# EAGLE board ai_breakout_apa102_panel (EAGLE 6.5.0), part 1 of 2
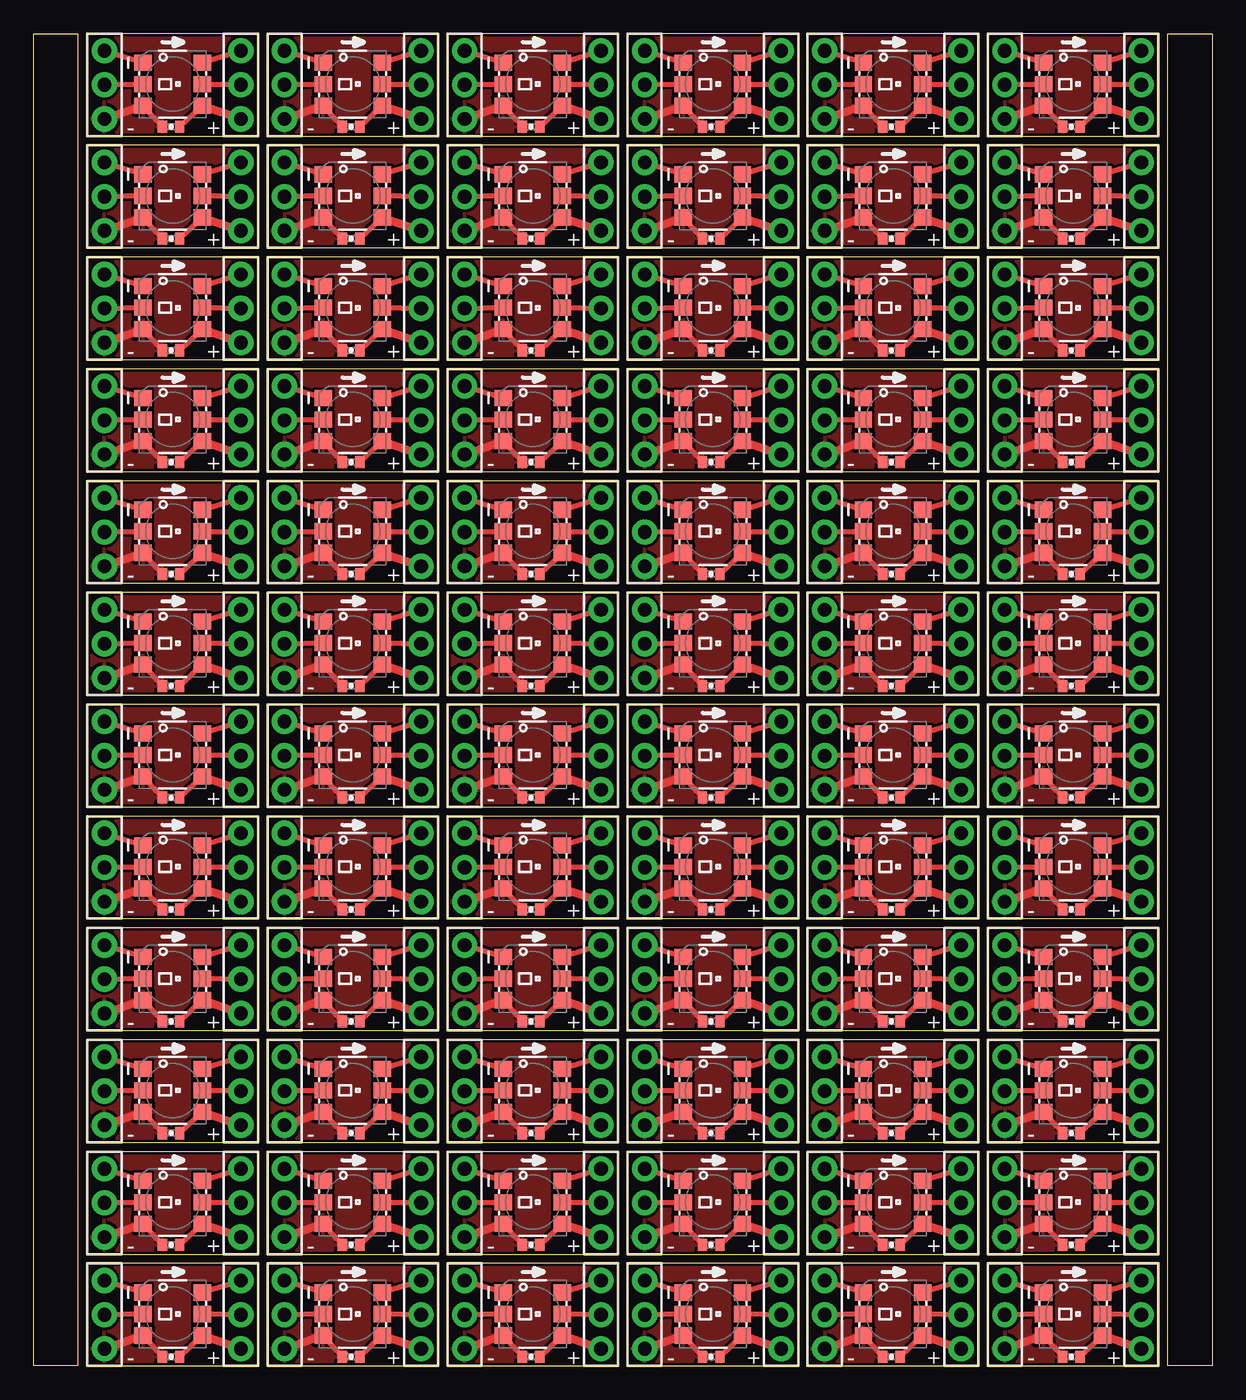
[diagram p0: board, top side]
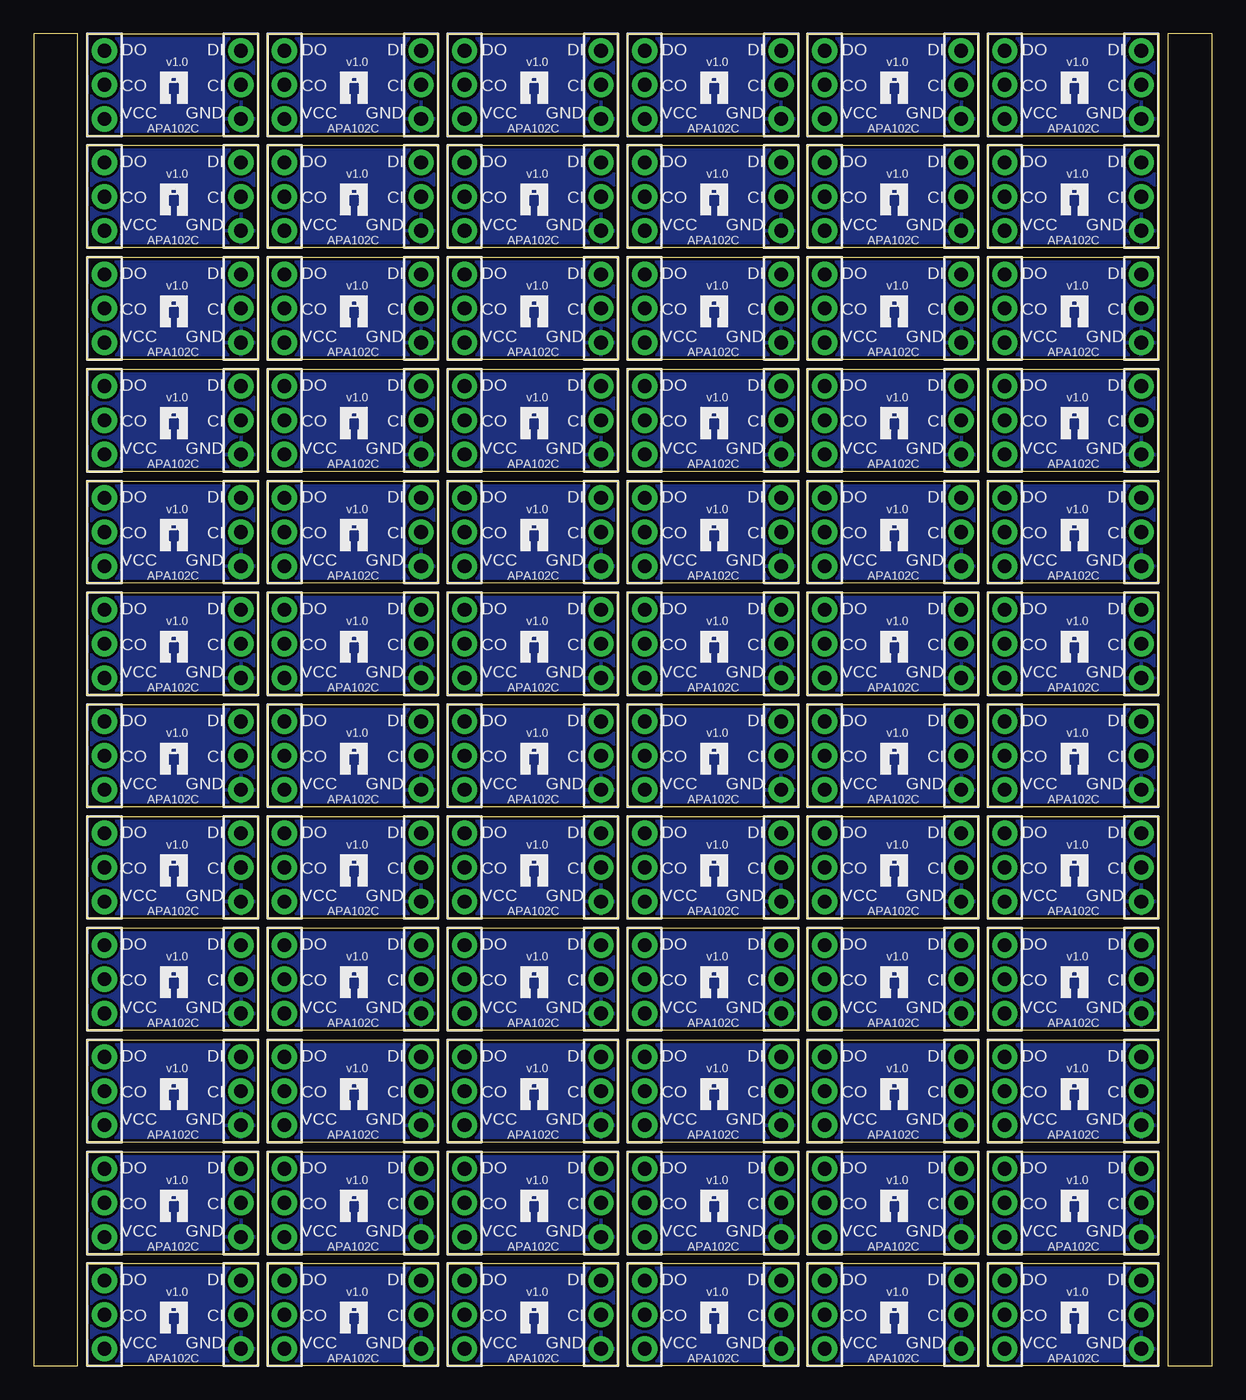
[diagram p1: board, bottom side, seen from below]

Size 87.7 x 99.14 mm. Coordinates in mm from the lower left corner, seen from the top.
Outline: 4,0 16.7,0 16.7,7.62 4,7.62 4,0
Outline: 0,0 0,99.14 3.3,99.14 3.3,0 0,0
Outline: 4,8.32 16.7,8.32 16.7,15.94 4,15.94 4,8.32
Outline: 4,16.64 16.7,16.64 16.7,24.26 4,24.26 4,16.64
Outline: 4,24.96 16.7,24.96 16.7,32.58 4,32.58 4,24.96
Outline: 4,33.28 16.7,33.28 16.7,40.9 4,40.9 4,33.28
Outline: 4,41.6 16.7,41.6 16.7,49.22 4,49.22 4,41.6
Outline: 4,49.92 16.7,49.92 16.7,57.54 4,57.54 4,49.92
Outline: 4,58.24 16.7,58.24 16.7,65.86 4,65.86 4,58.24
Outline: 4,66.56 16.7,66.56 16.7,74.18 4,74.18 4,66.56
Outline: 4,74.88 16.7,74.88 16.7,82.5 4,82.5 4,74.88
Outline: 4,83.2 16.7,83.2 16.7,90.82 4,90.82 4,83.2
Outline: 4,91.52 16.7,91.52 16.7,99.14 4,99.14 4,91.52
Outline: 17.4,0 30.1,0 30.1,7.62 17.4,7.62 17.4,0
Outline: 17.4,8.32 30.1,8.32 30.1,15.94 17.4,15.94 17.4,8.32
Outline: 17.4,16.64 30.1,16.64 30.1,24.26 17.4,24.26 17.4,16.64
Outline: 17.4,24.96 30.1,24.96 30.1,32.58 17.4,32.58 17.4,24.96
Outline: 17.4,33.28 30.1,33.28 30.1,40.9 17.4,40.9 17.4,33.28
Outline: 17.4,41.6 30.1,41.6 30.1,49.22 17.4,49.22 17.4,41.6
Outline: 17.4,49.92 30.1,49.92 30.1,57.54 17.4,57.54 17.4,49.92
Outline: 17.4,58.24 30.1,58.24 30.1,65.86 17.4,65.86 17.4,58.24
Outline: 17.4,66.56 30.1,66.56 30.1,74.18 17.4,74.18 17.4,66.56
Outline: 17.4,74.88 30.1,74.88 30.1,82.5 17.4,82.5 17.4,74.88
Outline: 17.4,83.2 30.1,83.2 30.1,90.82 17.4,90.82 17.4,83.2
Outline: 17.4,91.52 30.1,91.52 30.1,99.14 17.4,99.14 17.4,91.52
Outline: 30.8,0 43.5,0 43.5,7.62 30.8,7.62 30.8,0
Outline: 30.8,8.32 43.5,8.32 43.5,15.94 30.8,15.94 30.8,8.32
Outline: 30.8,16.64 43.5,16.64 43.5,24.26 30.8,24.26 30.8,16.64
Outline: 30.8,24.96 43.5,24.96 43.5,32.58 30.8,32.58 30.8,24.96
Outline: 30.8,33.28 43.5,33.28 43.5,40.9 30.8,40.9 30.8,33.28
Outline: 30.8,41.6 43.5,41.6 43.5,49.22 30.8,49.22 30.8,41.6
Outline: 30.8,49.92 43.5,49.92 43.5,57.54 30.8,57.54 30.8,49.92
Outline: 30.8,58.24 43.5,58.24 43.5,65.86 30.8,65.86 30.8,58.24
Outline: 30.8,66.56 43.5,66.56 43.5,74.18 30.8,74.18 30.8,66.56
Outline: 30.8,74.88 43.5,74.88 43.5,82.5 30.8,82.5 30.8,74.88
Outline: 30.8,83.2 43.5,83.2 43.5,90.82 30.8,90.82 30.8,83.2
Outline: 30.8,91.52 43.5,91.52 43.5,99.14 30.8,99.14 30.8,91.52
Outline: 44.2,0 56.9,0 56.9,7.62 44.2,7.62 44.2,0
Outline: 44.2,8.32 56.9,8.32 56.9,15.94 44.2,15.94 44.2,8.32
Outline: 44.2,16.64 56.9,16.64 56.9,24.26 44.2,24.26 44.2,16.64
Outline: 44.2,24.96 56.9,24.96 56.9,32.58 44.2,32.58 44.2,24.96
Outline: 44.2,33.28 56.9,33.28 56.9,40.9 44.2,40.9 44.2,33.28
Outline: 44.2,41.6 56.9,41.6 56.9,49.22 44.2,49.22 44.2,41.6
Outline: 44.2,49.92 56.9,49.92 56.9,57.54 44.2,57.54 44.2,49.92
Outline: 44.2,58.24 56.9,58.24 56.9,65.86 44.2,65.86 44.2,58.24
Outline: 44.2,66.56 56.9,66.56 56.9,74.18 44.2,74.18 44.2,66.56
Outline: 44.2,74.88 56.9,74.88 56.9,82.5 44.2,82.5 44.2,74.88
Outline: 44.2,83.2 56.9,83.2 56.9,90.82 44.2,90.82 44.2,83.2
Outline: 44.2,91.52 56.9,91.52 56.9,99.14 44.2,99.14 44.2,91.52
Outline: 57.6,0 70.3,0 70.3,7.62 57.6,7.62 57.6,0
Outline: 57.6,8.32 70.3,8.32 70.3,15.94 57.6,15.94 57.6,8.32
Outline: 57.6,16.64 70.3,16.64 70.3,24.26 57.6,24.26 57.6,16.64
Outline: 57.6,24.96 70.3,24.96 70.3,32.58 57.6,32.58 57.6,24.96
Outline: 57.6,33.28 70.3,33.28 70.3,40.9 57.6,40.9 57.6,33.28
Outline: 57.6,41.6 70.3,41.6 70.3,49.22 57.6,49.22 57.6,41.6
Outline: 57.6,49.92 70.3,49.92 70.3,57.54 57.6,57.54 57.6,49.92
Outline: 57.6,58.24 70.3,58.24 70.3,65.86 57.6,65.86 57.6,58.24
Outline: 57.6,66.56 70.3,66.56 70.3,74.18 57.6,74.18 57.6,66.56
Outline: 57.6,74.88 70.3,74.88 70.3,82.5 57.6,82.5 57.6,74.88
Outline: 57.6,83.2 70.3,83.2 70.3,90.82 57.6,90.82 57.6,83.2
Outline: 57.6,91.52 70.3,91.52 70.3,99.14 57.6,99.14 57.6,91.52
Outline: 71,0 83.7,0 83.7,7.62 71,7.62 71,0
Outline: 71,8.32 83.7,8.32 83.7,15.94 71,15.94 71,8.32
Outline: 71,16.64 83.7,16.64 83.7,24.26 71,24.26 71,16.64
Outline: 71,24.96 83.7,24.96 83.7,32.58 71,32.58 71,24.96
Outline: 71,33.28 83.7,33.28 83.7,40.9 71,40.9 71,33.28
Outline: 71,41.6 83.7,41.6 83.7,49.22 71,49.22 71,41.6
Outline: 71,49.92 83.7,49.92 83.7,57.54 71,57.54 71,49.92
Outline: 71,58.24 83.7,58.24 83.7,65.86 71,65.86 71,58.24
Outline: 71,66.56 83.7,66.56 83.7,74.18 71,74.18 71,66.56
Outline: 71,74.88 83.7,74.88 83.7,82.5 71,82.5 71,74.88
Outline: 71,83.2 83.7,83.2 83.7,90.82 71,90.82 71,83.2
Outline: 71,91.52 83.7,91.52 83.7,99.14 71,99.14 71,91.52
Outline: 84.4,0 84.4,99.14 87.7,99.14 87.7,0 84.4,0
Copper layers (1*16): Top 0.035mm / dielectric 1.5mm / Bottom 0.035mm
Design rules "ai_2layer": minimum track width 7mil, minimum drill 15mil, track to track 8mil, track to pad 8mil, pad to pad 8mil, via to via 8mil, smd to smd 8mil, copper to edge 8mil, drill to drill 8mil, minimum pad ring 12mil, minimum via ring 10mil, stop-mask expansion 4mil, vias tented up to drill 20mil, thermal gap 10mil

## Footprints (pad centres in the part's own frame; a part is rotated, then mirrored left to right if it is on the bottom)
CAP-0402 = smd 0.7 x 0.9: 1 -0.65,0; 2 0.65,0
1X03 = drill 1.016 pad 1.88: 1 -2.54,0; 2 0,0; 3 2.54,0
LED-APA102 = smd 1.3 x 1.2: 1 -2.2,1.6; 2 -2.2,0; 3 -2.2,-1.6; 4 2.2,-1.6; 5 2.2,0; 6 2.2,1.6
1X03-NOFIRST = drill 1.016 pad 1.88: 1 -2.54,0; 2 0,0; 3 2.54,0

## Placement (x,y rotation side)
C1  0.1uF  [CAP-0402]  10.22,0.69 180 top
C2  0.1uF  [CAP-0402]  10.22,9.01 180 top
C3  0.1uF  [CAP-0402]  10.22,17.33 180 top
C4  0.1uF  [CAP-0402]  10.22,25.65 180 top
C5  0.1uF  [CAP-0402]  10.22,33.97 180 top
C6  0.1uF  [CAP-0402]  10.22,42.29 180 top
C7  0.1uF  [CAP-0402]  10.22,50.61 180 top
C8  0.1uF  [CAP-0402]  10.22,58.93 180 top
C9  0.1uF  [CAP-0402]  10.22,67.25 180 top
C10  0.1uF  [CAP-0402]  10.22,75.57 180 top
C11  0.1uF  [CAP-0402]  10.22,83.89 180 top
C12  0.1uF  [CAP-0402]  10.22,92.21 180 top
C13  0.1uF  [CAP-0402]  23.62,0.69 180 top
C14  0.1uF  [CAP-0402]  23.62,9.01 180 top
C15  0.1uF  [CAP-0402]  23.62,17.33 180 top
C16  0.1uF  [CAP-0402]  23.62,25.65 180 top
C17  0.1uF  [CAP-0402]  23.62,33.97 180 top
C18  0.1uF  [CAP-0402]  23.62,42.29 180 top
C19  0.1uF  [CAP-0402]  23.62,50.61 180 top
C20  0.1uF  [CAP-0402]  23.62,58.93 180 top
C21  0.1uF  [CAP-0402]  23.62,67.25 180 top
C22  0.1uF  [CAP-0402]  23.62,75.57 180 top
C23  0.1uF  [CAP-0402]  23.62,83.89 180 top
C24  0.1uF  [CAP-0402]  23.62,92.21 180 top
C25  0.1uF  [CAP-0402]  37.02,0.69 180 top
C26  0.1uF  [CAP-0402]  37.02,9.01 180 top
C27  0.1uF  [CAP-0402]  37.02,17.33 180 top
C28  0.1uF  [CAP-0402]  37.02,25.65 180 top
C29  0.1uF  [CAP-0402]  37.02,33.97 180 top
C30  0.1uF  [CAP-0402]  37.02,42.29 180 top
C31  0.1uF  [CAP-0402]  37.02,50.61 180 top
C32  0.1uF  [CAP-0402]  37.02,58.93 180 top
C33  0.1uF  [CAP-0402]  37.02,67.25 180 top
C34  0.1uF  [CAP-0402]  37.02,75.57 180 top
C35  0.1uF  [CAP-0402]  37.02,83.89 180 top
C36  0.1uF  [CAP-0402]  37.02,92.21 180 top
C37  0.1uF  [CAP-0402]  50.42,0.69 180 top
C38  0.1uF  [CAP-0402]  50.42,9.01 180 top
C39  0.1uF  [CAP-0402]  50.42,17.33 180 top
C40  0.1uF  [CAP-0402]  50.42,25.65 180 top
C41  0.1uF  [CAP-0402]  50.42,33.97 180 top
C42  0.1uF  [CAP-0402]  50.42,42.29 180 top
C43  0.1uF  [CAP-0402]  50.42,50.61 180 top
C44  0.1uF  [CAP-0402]  50.42,58.93 180 top
C45  0.1uF  [CAP-0402]  50.42,67.25 180 top
C46  0.1uF  [CAP-0402]  50.42,75.57 180 top
C47  0.1uF  [CAP-0402]  50.42,83.89 180 top
C48  0.1uF  [CAP-0402]  50.42,92.21 180 top
C49  0.1uF  [CAP-0402]  63.82,0.69 180 top
C50  0.1uF  [CAP-0402]  63.82,9.01 180 top
C51  0.1uF  [CAP-0402]  63.82,17.33 180 top
C52  0.1uF  [CAP-0402]  63.82,25.65 180 top
C53  0.1uF  [CAP-0402]  63.82,33.97 180 top
C54  0.1uF  [CAP-0402]  63.82,42.29 180 top
C55  0.1uF  [CAP-0402]  63.82,50.61 180 top
C56  0.1uF  [CAP-0402]  63.82,58.93 180 top
C57  0.1uF  [CAP-0402]  63.82,67.25 180 top
C58  0.1uF  [CAP-0402]  63.82,75.57 180 top
C59  0.1uF  [CAP-0402]  63.82,83.89 180 top
C60  0.1uF  [CAP-0402]  63.82,92.21 180 top
C61  0.1uF  [CAP-0402]  77.22,0.69 180 top
C62  0.1uF  [CAP-0402]  77.22,9.01 180 top
C63  0.1uF  [CAP-0402]  77.22,17.33 180 top
C64  0.1uF  [CAP-0402]  77.22,25.65 180 top
C65  0.1uF  [CAP-0402]  77.22,33.97 180 top
C66  0.1uF  [CAP-0402]  77.22,42.29 180 top
C67  0.1uF  [CAP-0402]  77.22,50.61 180 top
C68  0.1uF  [CAP-0402]  77.22,58.93 180 top
C69  0.1uF  [CAP-0402]  77.22,67.25 180 top
C70  0.1uF  [CAP-0402]  77.22,75.57 180 top
C71  0.1uF  [CAP-0402]  77.22,83.89 180 top
C72  0.1uF  [CAP-0402]  77.22,92.21 180 top
IN  1X03  [1X03]  5.27,3.81 270 top
IN1  1X03  [1X03]  5.27,12.13 270 top
IN2  1X03  [1X03]  5.27,20.45 270 top
IN3  1X03  [1X03]  5.27,28.77 270 top
IN4  1X03  [1X03]  5.27,37.09 270 top
IN5  1X03  [1X03]  5.27,45.41 270 top
IN6  1X03  [1X03]  5.27,53.73 270 top
IN7  1X03  [1X03]  5.27,62.05 270 top
IN8  1X03  [1X03]  5.27,70.37 270 top
IN9  1X03  [1X03]  5.27,78.69 270 top
IN10  1X03  [1X03]  5.27,87.01 270 top
IN11  1X03  [1X03]  5.27,95.33 270 top
IN12  1X03  [1X03]  18.67,3.81 270 top
IN13  1X03  [1X03]  18.67,12.13 270 top
IN14  1X03  [1X03]  18.67,20.45 270 top
IN15  1X03  [1X03]  18.67,28.77 270 top
IN16  1X03  [1X03]  18.67,37.09 270 top
IN17  1X03  [1X03]  18.67,45.41 270 top
IN18  1X03  [1X03]  18.67,53.73 270 top
IN19  1X03  [1X03]  18.67,62.05 270 top
IN20  1X03  [1X03]  18.67,70.37 270 top
IN21  1X03  [1X03]  18.67,78.69 270 top
IN22  1X03  [1X03]  18.67,87.01 270 top
IN23  1X03  [1X03]  18.67,95.33 270 top
IN24  1X03  [1X03]  32.07,3.81 270 top
IN25  1X03  [1X03]  32.07,12.13 270 top
IN26  1X03  [1X03]  32.07,20.45 270 top
IN27  1X03  [1X03]  32.07,28.77 270 top
IN28  1X03  [1X03]  32.07,37.09 270 top
IN29  1X03  [1X03]  32.07,45.41 270 top
IN30  1X03  [1X03]  32.07,53.73 270 top
IN31  1X03  [1X03]  32.07,62.05 270 top
IN32  1X03  [1X03]  32.07,70.37 270 top
IN33  1X03  [1X03]  32.07,78.69 270 top
IN34  1X03  [1X03]  32.07,87.01 270 top
IN35  1X03  [1X03]  32.07,95.33 270 top
IN36  1X03  [1X03]  45.47,3.81 270 top
IN37  1X03  [1X03]  45.47,12.13 270 top
IN38  1X03  [1X03]  45.47,20.45 270 top
IN39  1X03  [1X03]  45.47,28.77 270 top
IN40  1X03  [1X03]  45.47,37.09 270 top
IN41  1X03  [1X03]  45.47,45.41 270 top
IN42  1X03  [1X03]  45.47,53.73 270 top
IN43  1X03  [1X03]  45.47,62.05 270 top
IN44  1X03  [1X03]  45.47,70.37 270 top
IN45  1X03  [1X03]  45.47,78.69 270 top
IN46  1X03  [1X03]  45.47,87.01 270 top
IN47  1X03  [1X03]  45.47,95.33 270 top
IN48  1X03  [1X03]  58.87,3.81 270 top
IN49  1X03  [1X03]  58.87,12.13 270 top
IN50  1X03  [1X03]  58.87,20.45 270 top
IN51  1X03  [1X03]  58.87,28.77 270 top
IN52  1X03  [1X03]  58.87,37.09 270 top
IN53  1X03  [1X03]  58.87,45.41 270 top
IN54  1X03  [1X03]  58.87,53.73 270 top
IN55  1X03  [1X03]  58.87,62.05 270 top
IN56  1X03  [1X03]  58.87,70.37 270 top
IN57  1X03  [1X03]  58.87,78.69 270 top
IN58  1X03  [1X03]  58.87,87.01 270 top
IN59  1X03  [1X03]  58.87,95.33 270 top
IN60  1X03  [1X03]  72.27,3.81 270 top
IN61  1X03  [1X03]  72.27,12.13 270 top
IN62  1X03  [1X03]  72.27,20.45 270 top
IN63  1X03  [1X03]  72.27,28.77 270 top
IN64  1X03  [1X03]  72.27,37.09 270 top
IN65  1X03  [1X03]  72.27,45.41 270 top
IN66  1X03  [1X03]  72.27,53.73 270 top
IN67  1X03  [1X03]  72.27,62.05 270 top
IN68  1X03  [1X03]  72.27,70.37 270 top
IN69  1X03  [1X03]  72.27,78.69 270 top
IN70  1X03  [1X03]  72.27,87.01 270 top
IN71  1X03  [1X03]  72.27,95.33 270 top
LED1  LED-APA102  [LED-APA102]  10.35,3.86 0 top
LED2  LED-APA102  [LED-APA102]  10.35,12.18 0 top
LED3  LED-APA102  [LED-APA102]  10.35,20.5 0 top
LED4  LED-APA102  [LED-APA102]  10.35,28.82 0 top
LED5  LED-APA102  [LED-APA102]  10.35,37.14 0 top
LED6  LED-APA102  [LED-APA102]  10.35,45.46 0 top
LED7  LED-APA102  [LED-APA102]  10.35,53.78 0 top
LED8  LED-APA102  [LED-APA102]  10.35,62.1 0 top
LED9  LED-APA102  [LED-APA102]  10.35,70.42 0 top
LED10  LED-APA102  [LED-APA102]  10.35,78.74 0 top
LED11  LED-APA102  [LED-APA102]  10.35,87.06 0 top
LED12  LED-APA102  [LED-APA102]  10.35,95.38 0 top
LED13  LED-APA102  [LED-APA102]  23.75,3.86 0 top
LED14  LED-APA102  [LED-APA102]  23.75,12.18 0 top
LED15  LED-APA102  [LED-APA102]  23.75,20.5 0 top
LED16  LED-APA102  [LED-APA102]  23.75,28.82 0 top
LED17  LED-APA102  [LED-APA102]  23.75,37.14 0 top
LED18  LED-APA102  [LED-APA102]  23.75,45.46 0 top
LED19  LED-APA102  [LED-APA102]  23.75,53.78 0 top
LED20  LED-APA102  [LED-APA102]  23.75,62.1 0 top
LED21  LED-APA102  [LED-APA102]  23.75,70.42 0 top
LED22  LED-APA102  [LED-APA102]  23.75,78.74 0 top
LED23  LED-APA102  [LED-APA102]  23.75,87.06 0 top
LED24  LED-APA102  [LED-APA102]  23.75,95.38 0 top
LED25  LED-APA102  [LED-APA102]  37.15,3.86 0 top
LED26  LED-APA102  [LED-APA102]  37.15,12.18 0 top
LED27  LED-APA102  [LED-APA102]  37.15,20.5 0 top
LED28  LED-APA102  [LED-APA102]  37.15,28.82 0 top
LED29  LED-APA102  [LED-APA102]  37.15,37.14 0 top
LED30  LED-APA102  [LED-APA102]  37.15,45.46 0 top
LED31  LED-APA102  [LED-APA102]  37.15,53.78 0 top
LED32  LED-APA102  [LED-APA102]  37.15,62.1 0 top
LED33  LED-APA102  [LED-APA102]  37.15,70.42 0 top
LED34  LED-APA102  [LED-APA102]  37.15,78.74 0 top
LED35  LED-APA102  [LED-APA102]  37.15,87.06 0 top
LED36  LED-APA102  [LED-APA102]  37.15,95.38 0 top
LED37  LED-APA102  [LED-APA102]  50.55,3.86 0 top
LED38  LED-APA102  [LED-APA102]  50.55,12.18 0 top
LED39  LED-APA102  [LED-APA102]  50.55,20.5 0 top
LED40  LED-APA102  [LED-APA102]  50.55,28.82 0 top
LED41  LED-APA102  [LED-APA102]  50.55,37.14 0 top
LED42  LED-APA102  [LED-APA102]  50.55,45.46 0 top
LED43  LED-APA102  [LED-APA102]  50.55,53.78 0 top
LED44  LED-APA102  [LED-APA102]  50.55,62.1 0 top
LED45  LED-APA102  [LED-APA102]  50.55,70.42 0 top
LED46  LED-APA102  [LED-APA102]  50.55,78.74 0 top
LED47  LED-APA102  [LED-APA102]  50.55,87.06 0 top
LED48  LED-APA102  [LED-APA102]  50.55,95.38 0 top
LED49  LED-APA102  [LED-APA102]  63.95,3.86 0 top
LED50  LED-APA102  [LED-APA102]  63.95,12.18 0 top
LED51  LED-APA102  [LED-APA102]  63.95,20.5 0 top
LED52  LED-APA102  [LED-APA102]  63.95,28.82 0 top
LED53  LED-APA102  [LED-APA102]  63.95,37.14 0 top
LED54  LED-APA102  [LED-APA102]  63.95,45.46 0 top
LED55  LED-APA102  [LED-APA102]  63.95,53.78 0 top
LED56  LED-APA102  [LED-APA102]  63.95,62.1 0 top
LED57  LED-APA102  [LED-APA102]  63.95,70.42 0 top
LED58  LED-APA102  [LED-APA102]  63.95,78.74 0 top
LED59  LED-APA102  [LED-APA102]  63.95,87.06 0 top
LED60  LED-APA102  [LED-APA102]  63.95,95.38 0 top
LED61  LED-APA102  [LED-APA102]  77.35,3.86 0 top
LED62  LED-APA102  [LED-APA102]  77.35,12.18 0 top
LED63  LED-APA102  [LED-APA102]  77.35,20.5 0 top
LED64  LED-APA102  [LED-APA102]  77.35,28.82 0 top
LED65  LED-APA102  [LED-APA102]  77.35,37.14 0 top
LED66  LED-APA102  [LED-APA102]  77.35,45.46 0 top
LED67  LED-APA102  [LED-APA102]  77.35,53.78 0 top
LED68  LED-APA102  [LED-APA102]  77.35,62.1 0 top
LED69  LED-APA102  [LED-APA102]  77.35,70.42 0 top
LED70  LED-APA102  [LED-APA102]  77.35,78.74 0 top
LED71  LED-APA102  [LED-APA102]  77.35,87.06 0 top
LED72  LED-APA102  [LED-APA102]  77.35,95.38 0 top
OUT  1X03NOFIRST  [1X03-NOFIRST]  15.43,3.81 90 top
OUT1  1X03NOFIRST  [1X03-NOFIRST]  15.43,12.13 90 top
OUT2  1X03NOFIRST  [1X03-NOFIRST]  15.43,20.45 90 top
OUT3  1X03NOFIRST  [1X03-NOFIRST]  15.43,28.77 90 top
OUT4  1X03NOFIRST  [1X03-NOFIRST]  15.43,37.09 90 top
OUT5  1X03NOFIRST  [1X03-NOFIRST]  15.43,45.41 90 top
OUT6  1X03NOFIRST  [1X03-NOFIRST]  15.43,53.73 90 top
OUT7  1X03NOFIRST  [1X03-NOFIRST]  15.43,62.05 90 top
OUT8  1X03NOFIRST  [1X03-NOFIRST]  15.43,70.37 90 top
OUT9  1X03NOFIRST  [1X03-NOFIRST]  15.43,78.69 90 top
OUT10  1X03NOFIRST  [1X03-NOFIRST]  15.43,87.01 90 top
OUT11  1X03NOFIRST  [1X03-NOFIRST]  15.43,95.33 90 top
OUT12  1X03NOFIRST  [1X03-NOFIRST]  28.83,3.81 90 top
OUT13  1X03NOFIRST  [1X03-NOFIRST]  28.83,12.13 90 top
OUT14  1X03NOFIRST  [1X03-NOFIRST]  28.83,20.45 90 top
OUT15  1X03NOFIRST  [1X03-NOFIRST]  28.83,28.77 90 top
OUT16  1X03NOFIRST  [1X03-NOFIRST]  28.83,37.09 90 top
OUT17  1X03NOFIRST  [1X03-NOFIRST]  28.83,45.41 90 top
OUT18  1X03NOFIRST  [1X03-NOFIRST]  28.83,53.73 90 top
OUT19  1X03NOFIRST  [1X03-NOFIRST]  28.83,62.05 90 top
OUT20  1X03NOFIRST  [1X03-NOFIRST]  28.83,70.37 90 top
OUT21  1X03NOFIRST  [1X03-NOFIRST]  28.83,78.69 90 top
OUT22  1X03NOFIRST  [1X03-NOFIRST]  28.83,87.01 90 top
OUT23  1X03NOFIRST  [1X03-NOFIRST]  28.83,95.33 90 top
OUT24  1X03NOFIRST  [1X03-NOFIRST]  42.23,3.81 90 top
OUT25  1X03NOFIRST  [1X03-NOFIRST]  42.23,12.13 90 top
OUT26  1X03NOFIRST  [1X03-NOFIRST]  42.23,20.45 90 top
OUT27  1X03NOFIRST  [1X03-NOFIRST]  42.23,28.77 90 top
OUT28  1X03NOFIRST  [1X03-NOFIRST]  42.23,37.09 90 top
OUT29  1X03NOFIRST  [1X03-NOFIRST]  42.23,45.41 90 top
OUT30  1X03NOFIRST  [1X03-NOFIRST]  42.23,53.73 90 top
OUT31  1X03NOFIRST  [1X03-NOFIRST]  42.23,62.05 90 top
OUT32  1X03NOFIRST  [1X03-NOFIRST]  42.23,70.37 90 top
OUT33  1X03NOFIRST  [1X03-NOFIRST]  42.23,78.69 90 top
OUT34  1X03NOFIRST  [1X03-NOFIRST]  42.23,87.01 90 top
OUT35  1X03NOFIRST  [1X03-NOFIRST]  42.23,95.33 90 top
OUT36  1X03NOFIRST  [1X03-NOFIRST]  55.63,3.81 90 top
OUT37  1X03NOFIRST  [1X03-NOFIRST]  55.63,12.13 90 top
OUT38  1X03NOFIRST  [1X03-NOFIRST]  55.63,20.45 90 top
OUT39  1X03NOFIRST  [1X03-NOFIRST]  55.63,28.77 90 top
OUT40  1X03NOFIRST  [1X03-NOFIRST]  55.63,37.09 90 top
OUT41  1X03NOFIRST  [1X03-NOFIRST]  55.63,45.41 90 top
OUT42  1X03NOFIRST  [1X03-NOFIRST]  55.63,53.73 90 top
OUT43  1X03NOFIRST  [1X03-NOFIRST]  55.63,62.05 90 top
OUT44  1X03NOFIRST  [1X03-NOFIRST]  55.63,70.37 90 top
OUT45  1X03NOFIRST  [1X03-NOFIRST]  55.63,78.69 90 top
OUT46  1X03NOFIRST  [1X03-NOFIRST]  55.63,87.01 90 top
OUT47  1X03NOFIRST  [1X03-NOFIRST]  55.63,95.33 90 top
OUT48  1X03NOFIRST  [1X03-NOFIRST]  69.03,3.81 90 top
OUT49  1X03NOFIRST  [1X03-NOFIRST]  69.03,12.13 90 top
OUT50  1X03NOFIRST  [1X03-NOFIRST]  69.03,20.45 90 top
OUT51  1X03NOFIRST  [1X03-NOFIRST]  69.03,28.77 90 top
OUT52  1X03NOFIRST  [1X03-NOFIRST]  69.03,37.09 90 top
OUT53  1X03NOFIRST  [1X03-NOFIRST]  69.03,45.41 90 top
OUT54  1X03NOFIRST  [1X03-NOFIRST]  69.03,53.73 90 top
OUT55  1X03NOFIRST  [1X03-NOFIRST]  69.03,62.05 90 top
OUT56  1X03NOFIRST  [1X03-NOFIRST]  69.03,70.37 90 top
OUT57  1X03NOFIRST  [1X03-NOFIRST]  69.03,78.69 90 top
OUT58  1X03NOFIRST  [1X03-NOFIRST]  69.03,87.01 90 top
OUT59  1X03NOFIRST  [1X03-NOFIRST]  69.03,95.33 90 top
OUT60  1X03NOFIRST  [1X03-NOFIRST]  82.43,3.81 90 top
OUT61  1X03NOFIRST  [1X03-NOFIRST]  82.43,12.13 90 top
OUT62  1X03NOFIRST  [1X03-NOFIRST]  82.43,20.45 90 top
OUT63  1X03NOFIRST  [1X03-NOFIRST]  82.43,28.77 90 top
OUT64  1X03NOFIRST  [1X03-NOFIRST]  82.43,37.09 90 top
OUT65  1X03NOFIRST  [1X03-NOFIRST]  82.43,45.41 90 top
OUT66  1X03NOFIRST  [1X03-NOFIRST]  82.43,53.73 90 top
OUT67  1X03NOFIRST  [1X03-NOFIRST]  82.43,62.05 90 top
OUT68  1X03NOFIRST  [1X03-NOFIRST]  82.43,70.37 90 top
OUT69  1X03NOFIRST  [1X03-NOFIRST]  82.43,78.69 90 top
OUT70  1X03NOFIRST  [1X03-NOFIRST]  82.43,87.01 90 top
OUT71  1X03NOFIRST  [1X03-NOFIRST]  82.43,95.33 90 top
U$1  [AI-LOGO-XS]  11.24,10.73 0 bottom
U$2  [AI-LOGO-XS]  11.24,19.05 0 bottom
U$3  [AI-LOGO-XS]  11.24,27.37 0 bottom
U$4  [AI-LOGO-XS]  11.24,35.69 0 bottom
U$5  [AI-LOGO-XS]  11.24,2.41 0 bottom
U$6  [AI-LOGO-XS]  11.24,44.01 0 bottom
U$7  [AI-LOGO-XS]  11.24,52.33 0 bottom
U$8  [AI-LOGO-XS]  11.24,60.65 0 bottom
U$9  [AI-LOGO-XS]  11.24,68.97 0 bottom
U$10  [AI-LOGO-XS]  11.24,77.29 0 bottom
U$11  [AI-LOGO-XS]  11.24,85.61 0 bottom
U$12  [AI-LOGO-XS]  11.24,93.93 0 bottom
U$13  [AI-LOGO-XS]  24.64,2.41 0 bottom
U$14  [AI-LOGO-XS]  24.64,10.73 0 bottom
U$15  [AI-LOGO-XS]  24.64,19.05 0 bottom
U$16  [AI-LOGO-XS]  24.64,27.37 0 bottom
U$17  [AI-LOGO-XS]  24.64,35.69 0 bottom
U$18  [AI-LOGO-XS]  24.64,44.01 0 bottom
U$19  [AI-LOGO-XS]  24.64,52.33 0 bottom
U$20  [AI-LOGO-XS]  24.64,60.65 0 bottom
U$21  [AI-LOGO-XS]  24.64,68.97 0 bottom
U$22  [AI-LOGO-XS]  24.64,77.29 0 bottom
U$23  [AI-LOGO-XS]  24.64,85.61 0 bottom
U$24  [AI-LOGO-XS]  24.64,93.93 0 bottom
U$25  [AI-LOGO-XS]  38.04,2.41 0 bottom
U$26  [AI-LOGO-XS]  38.04,10.73 0 bottom
U$27  [AI-LOGO-XS]  38.04,19.05 0 bottom
U$28  [AI-LOGO-XS]  38.04,27.37 0 bottom
U$29  [AI-LOGO-XS]  38.04,35.69 0 bottom
U$30  [AI-LOGO-XS]  38.04,44.01 0 bottom
U$31  [AI-LOGO-XS]  38.04,52.33 0 bottom
U$32  [AI-LOGO-XS]  38.04,60.65 0 bottom
U$33  [AI-LOGO-XS]  38.04,68.97 0 bottom
U$34  [AI-LOGO-XS]  38.04,77.29 0 bottom
U$35  [AI-LOGO-XS]  38.04,85.61 0 bottom
U$36  [AI-LOGO-XS]  38.04,93.93 0 bottom
U$37  [AI-LOGO-XS]  51.44,2.41 0 bottom
U$38  [AI-LOGO-XS]  51.44,10.73 0 bottom
U$39  [AI-LOGO-XS]  51.44,19.05 0 bottom
U$40  [AI-LOGO-XS]  51.44,27.37 0 bottom
U$41  [AI-LOGO-XS]  51.44,35.69 0 bottom
U$42  [AI-LOGO-XS]  51.44,44.01 0 bottom
U$43  [AI-LOGO-XS]  51.44,52.33 0 bottom
U$44  [AI-LOGO-XS]  51.44,60.65 0 bottom
U$45  [AI-LOGO-XS]  51.44,68.97 0 bottom
U$46  [AI-LOGO-XS]  51.44,77.29 0 bottom
U$47  [AI-LOGO-XS]  51.44,85.61 0 bottom
U$48  [AI-LOGO-XS]  51.44,93.93 0 bottom
U$49  [AI-LOGO-XS]  64.84,2.41 0 bottom
U$50  [AI-LOGO-XS]  64.84,10.73 0 bottom
U$51  [AI-LOGO-XS]  64.84,19.05 0 bottom
U$52  [AI-LOGO-XS]  64.84,27.37 0 bottom
U$53  [AI-LOGO-XS]  64.84,35.69 0 bottom
U$54  [AI-LOGO-XS]  64.84,44.01 0 bottom
U$55  [AI-LOGO-XS]  64.84,52.33 0 bottom
U$56  [AI-LOGO-XS]  64.84,60.65 0 bottom
U$57  [AI-LOGO-XS]  64.84,68.97 0 bottom
U$58  [AI-LOGO-XS]  64.84,77.29 0 bottom
U$59  [AI-LOGO-XS]  64.84,85.61 0 bottom
U$60  [AI-LOGO-XS]  64.84,93.93 0 bottom
U$61  [AI-LOGO-XS]  78.24,2.41 0 bottom
U$62  [AI-LOGO-XS]  78.24,10.73 0 bottom
U$63  [AI-LOGO-XS]  78.24,19.05 0 bottom
U$64  [AI-LOGO-XS]  78.24,27.37 0 bottom
U$65  [AI-LOGO-XS]  78.24,35.69 0 bottom
U$66  [AI-LOGO-XS]  78.24,44.01 0 bottom
U$67  [AI-LOGO-XS]  78.24,52.33 0 bottom
U$68  [AI-LOGO-XS]  78.24,60.65 0 bottom
U$69  [AI-LOGO-XS]  78.24,68.97 0 bottom
U$70  [AI-LOGO-XS]  78.24,77.29 0 bottom
U$71  [AI-LOGO-XS]  78.24,85.61 0 bottom
U$72  [AI-LOGO-XS]  78.24,93.93 0 bottom

## Library data of the parts
C1-C72 = Ai_Passives
IN IN1-IN71 OUT OUT1-OUT71 = Ai_Connectors
LED1-LED72 = Ai_LED
U$1-U$72 = Ai_Miscellany

## Nets
CI: IN.2 LED1.2
CI1: IN1.2 LED2.2
CI2: IN2.2 LED3.2
CI3: IN3.2 LED4.2
CI4: IN4.2 LED5.2
CI5: IN5.2 LED6.2
CI6: IN6.2 LED7.2
CI7: IN7.2 LED8.2
CI8: IN8.2 LED9.2
CI9: IN9.2 LED10.2
CI10: IN10.2 LED11.2
CI11: IN11.2 LED12.2
CI12: IN12.2 LED13.2
CI13: IN13.2 LED14.2
CI14: IN14.2 LED15.2
CI15: IN15.2 LED16.2
CI16: IN16.2 LED17.2
CI17: IN17.2 LED18.2
CI18: IN18.2 LED19.2
CI19: IN19.2 LED20.2
CI20: IN20.2 LED21.2
CI21: IN21.2 LED22.2
CI22: IN22.2 LED23.2
CI23: IN23.2 LED24.2
CI24: IN24.2 LED25.2
CI25: IN25.2 LED26.2
CI26: IN26.2 LED27.2
CI27: IN27.2 LED28.2
CI28: IN28.2 LED29.2
CI29: IN29.2 LED30.2
CI30: IN30.2 LED31.2
CI31: IN31.2 LED32.2
CI32: IN32.2 LED33.2
CI33: IN33.2 LED34.2
CI34: IN34.2 LED35.2
CI35: IN35.2 LED36.2
CI36: IN36.2 LED37.2
CI37: IN37.2 LED38.2
CI38: IN38.2 LED39.2
CI39: IN39.2 LED40.2
CI40: IN40.2 LED41.2
CI41: IN41.2 LED42.2
CI42: IN42.2 LED43.2
CI43: IN43.2 LED44.2
CI44: IN44.2 LED45.2
CI45: IN45.2 LED46.2
CI46: IN46.2 LED47.2
CI47: IN47.2 LED48.2
CI48: IN48.2 LED49.2
CI49: IN49.2 LED50.2
CI50: IN50.2 LED51.2
CI51: IN51.2 LED52.2
CI52: IN52.2 LED53.2
CI53: IN53.2 LED54.2
CI54: IN54.2 LED55.2
CI55: IN55.2 LED56.2
CI56: IN56.2 LED57.2
CI57: IN57.2 LED58.2
CI58: IN58.2 LED59.2
CI59: IN59.2 LED60.2
CI60: IN60.2 LED61.2
CI61: IN61.2 LED62.2
CI62: IN62.2 LED63.2
CI63: IN63.2 LED64.2
CI64: IN64.2 LED65.2
CI65: IN65.2 LED66.2
CI66: IN66.2 LED67.2
CI67: IN67.2 LED68.2
CI68: IN68.2 LED69.2
CI69: IN69.2 LED70.2
CI70: IN70.2 LED71.2
CI71: IN71.2 LED72.2
CO: LED1.5 OUT.2
CO1: LED2.5 OUT1.2
CO2: LED3.5 OUT2.2
CO3: LED4.5 OUT3.2
CO4: LED5.5 OUT4.2
CO5: LED6.5 OUT5.2
CO6: LED7.5 OUT6.2
CO7: LED8.5 OUT7.2
CO8: LED9.5 OUT8.2
CO9: LED10.5 OUT9.2
CO10: LED11.5 OUT10.2
CO11: LED12.5 OUT11.2
CO12: LED13.5 OUT12.2
CO13: LED14.5 OUT13.2
CO14: LED15.5 OUT14.2
CO15: LED16.5 OUT15.2
CO16: LED17.5 OUT16.2
CO17: LED18.5 OUT17.2
CO18: LED19.5 OUT18.2
CO19: LED20.5 OUT19.2
CO20: LED21.5 OUT20.2
CO21: LED22.5 OUT21.2
CO22: LED23.5 OUT22.2
CO23: LED24.5 OUT23.2
CO24: LED25.5 OUT24.2
CO25: LED26.5 OUT25.2
CO26: LED27.5 OUT26.2
CO27: LED28.5 OUT27.2
CO28: LED29.5 OUT28.2
CO29: LED30.5 OUT29.2
CO30: LED31.5 OUT30.2
CO31: LED32.5 OUT31.2
CO32: LED33.5 OUT32.2
CO33: LED34.5 OUT33.2
CO34: LED35.5 OUT34.2
CO35: LED36.5 OUT35.2
CO36: LED37.5 OUT36.2
CO37: LED38.5 OUT37.2
CO38: LED39.5 OUT38.2
CO39: LED40.5 OUT39.2
CO40: LED41.5 OUT40.2
CO41: LED42.5 OUT41.2
CO42: LED43.5 OUT42.2
CO43: LED44.5 OUT43.2
CO44: LED45.5 OUT44.2
CO45: LED46.5 OUT45.2
CO46: LED47.5 OUT46.2
CO47: LED48.5 OUT47.2
CO48: LED49.5 OUT48.2
CO49: LED50.5 OUT49.2
CO50: LED51.5 OUT50.2
CO51: LED52.5 OUT51.2
CO52: LED53.5 OUT52.2
CO53: LED54.5 OUT53.2
CO54: LED55.5 OUT54.2
CO55: LED56.5 OUT55.2
CO56: LED57.5 OUT56.2
CO57: LED58.5 OUT57.2
CO58: LED59.5 OUT58.2
CO59: LED60.5 OUT59.2
CO60: LED61.5 OUT60.2
CO61: LED62.5 OUT61.2
CO62: LED63.5 OUT62.2
CO63: LED64.5 OUT63.2
CO64: LED65.5 OUT64.2
CO65: LED66.5 OUT65.2
CO66: LED67.5 OUT66.2
CO67: LED68.5 OUT67.2
CO68: LED69.5 OUT68.2
CO69: LED70.5 OUT69.2
CO70: LED71.5 OUT70.2
CO71: LED72.5 OUT71.2
DI: IN.1 LED1.1
DI1: IN1.1 LED2.1
DI2: IN2.1 LED3.1
DI3: IN3.1 LED4.1
DI4: IN4.1 LED5.1
DI5: IN5.1 LED6.1
DI6: IN6.1 LED7.1
DI7: IN7.1 LED8.1
DI8: IN8.1 LED9.1
DI9: IN9.1 LED10.1
DI10: IN10.1 LED11.1
DI11: IN11.1 LED12.1
DI12: IN12.1 LED13.1
DI13: IN13.1 LED14.1
DI14: IN14.1 LED15.1
DI15: IN15.1 LED16.1
DI16: IN16.1 LED17.1
DI17: IN17.1 LED18.1
DI18: IN18.1 LED19.1
DI19: IN19.1 LED20.1
DI20: IN20.1 LED21.1
DI21: IN21.1 LED22.1
DI22: IN22.1 LED23.1
DI23: IN23.1 LED24.1
DI24: IN24.1 LED25.1
DI25: IN25.1 LED26.1
DI26: IN26.1 LED27.1
DI27: IN27.1 LED28.1
DI28: IN28.1 LED29.1
DI29: IN29.1 LED30.1
DI30: IN30.1 LED31.1
DI31: IN31.1 LED32.1
DI32: IN32.1 LED33.1
DI33: IN33.1 LED34.1
DI34: IN34.1 LED35.1
DI35: IN35.1 LED36.1
DI36: IN36.1 LED37.1
DI37: IN37.1 LED38.1
DI38: IN38.1 LED39.1
DI39: IN39.1 LED40.1
DI40: IN40.1 LED41.1
DI41: IN41.1 LED42.1
DI42: IN42.1 LED43.1
DI43: IN43.1 LED44.1
DI44: IN44.1 LED45.1
DI45: IN45.1 LED46.1
DI46: IN46.1 LED47.1
DI47: IN47.1 LED48.1
DI48: IN48.1 LED49.1
DI49: IN49.1 LED50.1
DI50: IN50.1 LED51.1
DI51: IN51.1 LED52.1
DI52: IN52.1 LED53.1
DI53: IN53.1 LED54.1
DI54: IN54.1 LED55.1
DI55: IN55.1 LED56.1
DI56: IN56.1 LED57.1
DI57: IN57.1 LED58.1
DI58: IN58.1 LED59.1
DI59: IN59.1 LED60.1
DI60: IN60.1 LED61.1
DI61: IN61.1 LED62.1
DI62: IN62.1 LED63.1
DI63: IN63.1 LED64.1
DI64: IN64.1 LED65.1
DI65: IN65.1 LED66.1
DI66: IN66.1 LED67.1
DI67: IN67.1 LED68.1
DI68: IN68.1 LED69.1
DI69: IN69.1 LED70.1
DI70: IN70.1 LED71.1
DI71: IN71.1 LED72.1
DO: LED1.6 OUT.3
DO1: LED2.6 OUT1.3
DO2: LED3.6 OUT2.3
DO3: LED4.6 OUT3.3
DO4: LED5.6 OUT4.3
DO5: LED6.6 OUT5.3
DO6: LED7.6 OUT6.3
DO7: LED8.6 OUT7.3
DO8: LED9.6 OUT8.3
DO9: LED10.6 OUT9.3
DO10: LED11.6 OUT10.3
DO11: LED12.6 OUT11.3
DO12: LED13.6 OUT12.3
DO13: LED14.6 OUT13.3
DO14: LED15.6 OUT14.3
DO15: LED16.6 OUT15.3
DO16: LED17.6 OUT16.3
DO17: LED18.6 OUT17.3
DO18: LED19.6 OUT18.3
DO19: LED20.6 OUT19.3
DO20: LED21.6 OUT20.3
DO21: LED22.6 OUT21.3
DO22: LED23.6 OUT22.3
DO23: LED24.6 OUT23.3
DO24: LED25.6 OUT24.3
DO25: LED26.6 OUT25.3
DO26: LED27.6 OUT26.3
DO27: LED28.6 OUT27.3
DO28: LED29.6 OUT28.3
DO29: LED30.6 OUT29.3
DO30: LED31.6 OUT30.3
DO31: LED32.6 OUT31.3
DO32: LED33.6 OUT32.3
DO33: LED34.6 OUT33.3
DO34: LED35.6 OUT34.3
DO35: LED36.6 OUT35.3
DO36: LED37.6 OUT36.3
DO37: LED38.6 OUT37.3
DO38: LED39.6 OUT38.3
DO39: LED40.6 OUT39.3
DO40: LED41.6 OUT40.3
DO41: LED42.6 OUT41.3
DO42: LED43.6 OUT42.3
DO43: LED44.6 OUT43.3
DO44: LED45.6 OUT44.3
DO45: LED46.6 OUT45.3
DO46: LED47.6 OUT46.3
DO47: LED48.6 OUT47.3
DO48: LED49.6 OUT48.3
DO49: LED50.6 OUT49.3
DO50: LED51.6 OUT50.3
DO51: LED52.6 OUT51.3
DO52: LED53.6 OUT52.3
DO53: LED54.6 OUT53.3
DO54: LED55.6 OUT54.3
DO55: LED56.6 OUT55.3
DO56: LED57.6 OUT56.3
DO57: LED58.6 OUT57.3
DO58: LED59.6 OUT58.3
DO59: LED60.6 OUT59.3
DO60: LED61.6 OUT60.3
DO61: LED62.6 OUT61.3
DO62: LED63.6 OUT62.3
DO63: LED64.6 OUT63.3
DO64: LED65.6 OUT64.3
DO65: LED66.6 OUT65.3
DO66: LED67.6 OUT66.3
DO67: LED68.6 OUT67.3
DO68: LED69.6 OUT68.3
DO69: LED70.6 OUT69.3
DO70: LED71.6 OUT70.3
DO71: LED72.6 OUT71.3
GND: C1.2 IN.3 LED1.3
GND1: C2.2 IN1.3 LED2.3
GND2: C3.2 IN2.3 LED3.3
GND3: C4.2 IN3.3 LED4.3
GND4: C5.2 IN4.3 LED5.3
GND5: C6.2 IN5.3 LED6.3
GND6: C7.2 IN6.3 LED7.3
GND7: C8.2 IN7.3 LED8.3
GND8: C9.2 IN8.3 LED9.3
GND9: C10.2 IN9.3 LED10.3
GND10: C11.2 IN10.3 LED11.3
GND11: C12.2 IN11.3 LED12.3
GND12: C13.2 IN12.3 LED13.3
GND13: C14.2 IN13.3 LED14.3
GND14: C15.2 IN14.3 LED15.3
GND15: C16.2 IN15.3 LED16.3
GND16: C17.2 IN16.3 LED17.3
GND17: C18.2 IN17.3 LED18.3
GND18: C19.2 IN18.3 LED19.3
GND19: C20.2 IN19.3 LED20.3
GND20: C21.2 IN20.3 LED21.3
GND21: C22.2 IN21.3 LED22.3
GND22: C23.2 IN22.3 LED23.3
GND23: C24.2 IN23.3 LED24.3
GND24: C25.2 IN24.3 LED25.3
GND25: C26.2 IN25.3 LED26.3
GND26: C27.2 IN26.3 LED27.3
GND27: C28.2 IN27.3 LED28.3
GND28: C29.2 IN28.3 LED29.3
GND29: C30.2 IN29.3 LED30.3
GND30: C31.2 IN30.3 LED31.3
GND31: C32.2 IN31.3 LED32.3
GND32: C33.2 IN32.3 LED33.3
GND33: C34.2 IN33.3 LED34.3
GND34: C35.2 IN34.3 LED35.3
GND35: C36.2 IN35.3 LED36.3
GND36: C37.2 IN36.3 LED37.3
GND37: C38.2 IN37.3 LED38.3
GND38: C39.2 IN38.3 LED39.3
GND39: C40.2 IN39.3 LED40.3
GND40: C41.2 IN40.3 LED41.3
GND41: C42.2 IN41.3 LED42.3
GND42: C43.2 IN42.3 LED43.3
GND43: C44.2 IN43.3 LED44.3
GND44: C45.2 IN44.3 LED45.3
GND45: C46.2 IN45.3 LED46.3
GND46: C47.2 IN46.3 LED47.3
GND47: C48.2 IN47.3 LED48.3
GND48: C49.2 IN48.3 LED49.3
GND49: C50.2 IN49.3 LED50.3
GND50: C51.2 IN50.3 LED51.3
GND51: C52.2 IN51.3 LED52.3
GND52: C53.2 IN52.3 LED53.3
GND53: C54.2 IN53.3 LED54.3
GND54: C55.2 IN54.3 LED55.3
GND55: C56.2 IN55.3 LED56.3
GND56: C57.2 IN56.3 LED57.3
GND57: C58.2 IN57.3 LED58.3
GND58: C59.2 IN58.3 LED59.3
GND59: C60.2 IN59.3 LED60.3
GND60: C61.2 IN60.3 LED61.3
GND61: C62.2 IN61.3 LED62.3
GND62: C63.2 IN62.3 LED63.3
GND63: C64.2 IN63.3 LED64.3
GND64: C65.2 IN64.3 LED65.3
GND65: C66.2 IN65.3 LED66.3
GND66: C67.2 IN66.3 LED67.3
GND67: C68.2 IN67.3 LED68.3
GND68: C69.2 IN68.3 LED69.3
GND69: C70.2 IN69.3 LED70.3
GND70: C71.2 IN70.3 LED71.3
GND71: C72.2 IN71.3 LED72.3
VCC: C1.1 LED1.4 OUT.1
VCC1: C2.1 LED2.4 OUT1.1
VCC2: C3.1 LED3.4 OUT2.1
VCC3: C4.1 LED4.4 OUT3.1
VCC4: C5.1 LED5.4 OUT4.1
VCC5: C6.1 LED6.4 OUT5.1
VCC6: C7.1 LED7.4 OUT6.1
VCC7: C8.1 LED8.4 OUT7.1
VCC8: C9.1 LED9.4 OUT8.1
VCC9: C10.1 LED10.4 OUT9.1
VCC10: C11.1 LED11.4 OUT10.1
VCC11: C12.1 LED12.4 OUT11.1
VCC12: C13.1 LED13.4 OUT12.1
VCC13: C14.1 LED14.4 OUT13.1
VCC14: C15.1 LED15.4 OUT14.1
VCC15: C16.1 LED16.4 OUT15.1
VCC16: C17.1 LED17.4 OUT16.1
VCC17: C18.1 LED18.4 OUT17.1
VCC18: C19.1 LED19.4 OUT18.1
VCC19: C20.1 LED20.4 OUT19.1
VCC20: C21.1 LED21.4 OUT20.1
VCC21: C22.1 LED22.4 OUT21.1
VCC22: C23.1 LED23.4 OUT22.1
VCC23: C24.1 LED24.4 OUT23.1
VCC24: C25.1 LED25.4 OUT24.1
VCC25: C26.1 LED26.4 OUT25.1
VCC26: C27.1 LED27.4 OUT26.1
VCC27: C28.1 LED28.4 OUT27.1
VCC28: C29.1 LED29.4 OUT28.1
VCC29: C30.1 LED30.4 OUT29.1
VCC30: C31.1 LED31.4 OUT30.1
VCC31: C32.1 LED32.4 OUT31.1
VCC32: C33.1 LED33.4 OUT32.1
VCC33: C34.1 LED34.4 OUT33.1
VCC34: C35.1 LED35.4 OUT34.1
VCC35: C36.1 LED36.4 OUT35.1
VCC36: C37.1 LED37.4 OUT36.1
VCC37: C38.1 LED38.4 OUT37.1
VCC38: C39.1 LED39.4 OUT38.1
VCC39: C40.1 LED40.4 OUT39.1
VCC40: C41.1 LED41.4 OUT40.1
VCC41: C42.1 LED42.4 OUT41.1
VCC42: C43.1 LED43.4 OUT42.1
VCC43: C44.1 LED44.4 OUT43.1
VCC44: C45.1 LED45.4 OUT44.1
VCC45: C46.1 LED46.4 OUT45.1
VCC46: C47.1 LED47.4 OUT46.1
VCC47: C48.1 LED48.4 OUT47.1
VCC48: C49.1 LED49.4 OUT48.1
VCC49: C50.1 LED50.4 OUT49.1
VCC50: C51.1 LED51.4 OUT50.1
VCC51: C52.1 LED52.4 OUT51.1
VCC52: C53.1 LED53.4 OUT52.1
VCC53: C54.1 LED54.4 OUT53.1
VCC54: C55.1 LED55.4 OUT54.1
VCC55: C56.1 LED56.4 OUT55.1
VCC56: C57.1 LED57.4 OUT56.1
VCC57: C58.1 LED58.4 OUT57.1
VCC58: C59.1 LED59.4 OUT58.1
VCC59: C60.1 LED60.4 OUT59.1
VCC60: C61.1 LED61.4 OUT60.1
VCC61: C62.1 LED62.4 OUT61.1
VCC62: C63.1 LED63.4 OUT62.1
VCC63: C64.1 LED64.4 OUT63.1
VCC64: C65.1 LED65.4 OUT64.1
VCC65: C66.1 LED66.4 OUT65.1
VCC66: C67.1 LED67.4 OUT66.1
VCC67: C68.1 LED68.4 OUT67.1
VCC68: C69.1 LED69.4 OUT68.1
VCC69: C70.1 LED70.4 OUT69.1
VCC70: C71.1 LED71.4 OUT70.1
VCC71: C72.1 LED72.4 OUT71.1